# EAGLE board stereo_mix (EAGLE 9.4.2)

Size 65 x 100 mm. Coordinates in mm from the lower left corner, seen from the top.
Outline: 0,0 48.26,0 48.26,27.81 65,27.81 65,100 0,100 0,0
Copper layers (1*16): Top 0.035559375mm / dielectric 1.6mm / Bottom 0.035559375mm
Design rules "jlcpcb2layer": minimum track width 5mil, minimum drill 12mil, track to track 5mil, track to pad 5mil, pad to pad 5mil, via to via 5mil, smd to smd 5mil, copper to edge 8mil, drill to drill 6mil, minimum pad ring 5mil, minimum via ring 3mil, stop-mask expansion 2.5mil, vias tented up to drill 0mil, thermal gap 10mil

## Footprints (pad centres in the part's own frame; a part is rotated, then mirrored left to right if it is on the bottom)
C0603 = smd 1.1 x 1: 1 -0.85,0; 2 0.85,0
SOD323-W = smd 1.5 x 1.2: A 1.45,0; C -1.45,0
SO16 = smd 0.6 x 2.2: 1 -4.445,-2.6; 2 -3.175,-2.6; 3 -1.905,-2.6; 4 -0.635,-2.6; 5 0.635,-2.6; 6 1.905,-2.6; 7 3.175,-2.6; 8 4.445,-2.6; 9 4.445,2.6; 10 3.175,2.6; 11 1.905,2.6; 12 0.635,2.6; 13 -0.635,2.6; 14 -1.905,2.6; 15 -3.175,2.6; 16 -4.445,2.6
TSSOP14 = smd 0.305 x 0.991: 1 -1.95,-2.918; 2 -1.3,-2.918; 3 -0.65,-2.918; 4 0,-2.918; 5 0.65,-2.918; 6 1.3,-2.918; 7 1.95,-2.918; 8 1.95,2.918; 9 1.3,2.918; 10 0.65,2.918; 11 0,2.918; 12 -0.65,2.918; 13 -1.3,2.918; 14 -1.95,2.918
TSSOP8 = smd 0.35 x 1.2: 1 -0.975,-2.925; 2 -0.325,-2.925; 3 0.325,-2.925; 4 0.975,-2.925; 5 0.975,2.925; 6 0.325,2.925; 7 -0.325,2.925; 8 -0.975,2.925
SOT363_PHILIPS = smd 0.4 x 0.8: 1 -0.65,-0.8; 2 0,-0.8; 3 0.65,-0.8; 4 0.65,0.8; 5 0,0.8; 6 -0.65,0.8
R0603 = smd 1 x 1.1: 1 -0.85,0; 2 0.85,0
RTRIMT93YA = drill 0.61: 1 0,-2.54; 2 0,0; 3 0,2.54
SOT23-BEC = smd 1 x 1.4: B -0.95,-1.1; C 0,1.1; E 0.95,-1.1
WQP-PJ301M-12_JACK = drill 1.1: P$1_TIP 0,5; P$2_SWITCH 0,-3.5; P$3_SLEEVE 0,-6.5
JP2 = drill 0.914 long: 1 -2.54,0; 2 0,0; 3 2.54,0
9MM_SNAP-IN_POT = drill 1.1 square: 1 -2.5,-7 | drill 1.1 octagon: 2 0,-7; 3 2.5,-7 | drill 2.1 pad 2.794: CHASSIS1 -4.5,0; CHASSIS2 4.5,0

## Placement (x,y rotation side)
C1:C1  100pF  [C0603]  14.61,97.54 90 bottom
C1:C2  22pF  [C0603]  7.24,92.71 0 bottom
C1:C3  100pF  [C0603]  31.62,98.3 0 bottom
C1:C4  22pF  [C0603]  34.67,94.36 270 bottom
C1:C5  100pF  [C0603]  10.29,14.35 0 bottom
C1:C6  100pF  [C0603]  1.65,19.68 270 bottom
C1:C7  100nF  [C0603]  22.86,92.46 0 top
C1:C8  100nF  [C0603]  11.43,92.08 270 top
C1:C9  100nF  [C0603]  21.97,84.33 180 top
C1:C10  100nF  [C0603]  10.79,21.97 270 bottom
C1:C11  100nF  [C0603]  49.53,85.6 180 top
C1:C12  100nF  [C0603]  63.25,94.49 270 top
C1:C13  100nF  [C0603]  22.86,94.74 180 top
C1:C14  100nF  [C0603]  1.65,22.73 90 bottom
C1:C15  100nF  [C0603]  49.53,87.63 180 top
C1:C16  100nF  [C0603]  62.48,82.3 180 top
C1:C17  100nF  [C0603]  25.02,83.44 0 top
C1:C18  100nF  [C0603]  11.43,95.12 270 top
C1:D1  1N4148  [SOD323-W]  3.3,83.57 180 bottom
C1:D2  1N4148  [SOD323-W]  3.3,93.73 180 bottom
C1:IC1  LM13700M  [SO16]  22.86,83.82 0 bottom
C1:IC2  TL084PW  [TSSOP14]  11.43,93.6 0 bottom
C1:IC3  LM13700M  [SO16]  49.53,84.33 90 bottom
C1:IC4  TL084PW  [TSSOP14]  22.86,93.6 0 bottom
C1:IC5  TL084PW  [TSSOP14]  6.35,21.08 270 bottom
C1:IC6  TL082PW  [TSSOP8]  60.45,88.27 270 bottom
C1:Q1  BC847BS  [SOT363_PHILIPS]  2.54,14.48 180 bottom
C1:R1  22  [R0603]  12.83,82.3 180 bottom
C1:R2  470  [R0603]  9.78,82.3 180 bottom
C1:R3  510  [R0603]  8.89,84.33 180 bottom
C1:R4  21k  [R0603]  8.89,86.36 180 bottom
C1:R5  12k  [R0603]  31.62,82.42 0 bottom
C1:R6  7k2  [R0603]  31.62,80.39 0 bottom
C1:R7  6k8  [R0603]  12.83,86.87 90 bottom
C1:R8  560  [R0603]  8.89,88.39 180 bottom
C1:R9  15k  [R0603]  5.84,88.39 180 bottom
C1:R10  100k  [R0603]  7.24,90.68 0 bottom
C1:R11  680  [R0603]  4.19,90.68 180 bottom
C1:R12  1M  [R0603]  58.42,93.09 0 bottom
C1:R13  100k  [RTRIMT93YA]  59.69,96.52 270 bottom
C1:R14  47k  [R0603]  22.35,88.9 0 bottom
C1:R15  100k  [R0603]  8.76,98.04 0 bottom
C1:R16  68k  [R0603]  11.81,98.04 0 bottom
C1:R17  15k  [R0603]  19.05,92.2 270 bottom
C1:R18  680k  [R0603]  19.05,89.15 270 bottom
C1:R19  22  [R0603]  44.45,87.63 270 bottom
C1:R20  470  [R0603]  41.91,88.39 180 bottom
C1:R21  510  [R0603]  12.83,84.33 180 bottom
C1:R22  21k  [R0603]  15.88,84.33 0 bottom
C1:R23  12k  [R0603]  41.91,86.36 180 bottom
C1:R24  7k2  [R0603]  4.7,97.54 270 bottom
C1:R25  6k8  [R0603]  25.4,88.9 0 bottom
C1:R26  560  [R0603]  19.05,95.25 270 bottom
C1:R27  15k  [R0603]  18.92,97.79 0 bottom
C1:R28  100k  [R0603]  49.53,92.96 180 bottom
C1:R29  680  [R0603]  49.53,90.93 180 bottom
C1:R30  1M  [R0603]  46.61,97.54 90 bottom
C1:R31  100k  [RTRIMT93YA]  40.64,96.52 270 bottom
C1:R32  47k  [R0603]  31.62,96.27 0 bottom
C1:R33  100k  [R0603]  21.97,98.42 0 bottom
C1:R34  68k  [R0603]  25.02,98.42 0 bottom
C1:R35  15k  [R0603]  32.26,92.71 0 bottom
C1:R36  680k  [R0603]  32.26,90.68 0 bottom
C1:R37  1M  [R0603]  55.37,90.42 90 bottom
C1:R38  1k  [R0603]  54.99,87.38 270 bottom
C1:R39  1M  [R0603]  10.79,18.92 90 bottom
C1:R40  10k  [R0603]  10.29,16.38 0 bottom
C1:R41  10M  [R0603]  2.03,11.18 270 bottom
C1:R42  1k5  [R0603]  2.54,17.14 0 bottom
C1:R43  100k  [R0603]  61.47,85.09 90 bottom
C1:R44  100k  [R0603]  63.5,85.09 90 bottom
C1:R45  100k  [R0603]  1.65,25.78 90 bottom
C1:R46  100k  [R0603]  58.42,91.06 0 bottom
C1:R47  200k  [R0603]  52.83,98.3 0 bottom
C1:R48  200k  [R0603]  52.83,96.27 180 bottom
C1:R49  100k  [R0603]  49.53,95 180 bottom
C1:R50  100k  [R0603]  49.53,97.03 180 bottom
C1:R51  100k  [R0603]  41.91,92.46 0 bottom
C1:R52  100k  [R0603]  41.91,90.42 180 bottom
C1:R53  100k  [R0603]  32.26,86.36 180 bottom
C1:R54  100k  [R0603]  36.96,84.33 180 bottom
C1:T1  3906  [SOT23-BEC]  2.54,86.36 0 bottom
C1:T2  3906  [SOT23-BEC]  16.51,91.06 180 bottom
C1:T3  3906  [SOT23-BEC]  2.54,96.52 0 bottom
C1:T4  3906  [SOT23-BEC]  29.21,91.44 0 bottom
C2:C1  100pF  [C0603]  111.76,53.34 0 bottom  (outside the outline)
C2:C2  22pF  [C0603]  104.14,53.34 0 bottom  (outside the outline)
C2:C3  100pF  [C0603]  96.52,53.34 0 bottom  (outside the outline)
C2:C4  22pF  [C0603]  88.9,53.34 0 bottom  (outside the outline)
C2:C5  100pF  [C0603]  81.28,53.34 0 bottom  (outside the outline)
C2:C6  100pF  [C0603]  73.66,53.34 0 bottom  (outside the outline)
C2:C7  100nF  [C0603]  134.62,48.26 0 bottom  (outside the outline)
C2:C8  100nF  [C0603]  127,48.26 0 bottom  (outside the outline)
C2:C9  100nF  [C0603]  119.38,48.26 0 bottom  (outside the outline)
C2:C10  100nF  [C0603]  100.33,86.36 0 bottom  (outside the outline)
C2:C11  100nF  [C0603]  127,53.34 0 bottom  (outside the outline)
C2:C12  100nF  [C0603]  92.71,86.36 0 bottom  (outside the outline)
C2:C13  100nF  [C0603]  85.09,86.36 0 bottom  (outside the outline)
C2:C14  100nF  [C0603]  77.47,86.36 0 bottom  (outside the outline)
C2:C15  100nF  [C0603]  134.62,78.74 0 bottom  (outside the outline)
C2:C16  100nF  [C0603]  127,78.74 0 bottom  (outside the outline)
C2:C17  100nF  [C0603]  119.38,78.74 0 bottom  (outside the outline)
C2:C18  100nF  [C0603]  111.76,78.74 0 bottom  (outside the outline)
C2:D1  1N4148  [SOD323-W]  116.84,85.09 0 bottom  (outside the outline)
C2:D2  1N4148  [SOD323-W]  107.95,85.09 0 bottom  (outside the outline)
C2:IC1  LM13700M  [SO16]  22.86,66.04 0 bottom
C2:IC2  TL084PW  [TSSOP14]  11.43,74.93 0 bottom
C2:IC3  LM13700M  [SO16]  49.53,67.69 90 bottom
C2:IC4  TL084PW  [TSSOP14]  22.86,74.93 0 bottom
C2:IC5  TL084PW  [TSSOP14]  16.51,20.95 270 bottom
C2:IC6  TL082PW  [TSSOP8]  59.82,70.99 270 bottom
C2:Q1  BC847BS  [SOT363_PHILIPS]  127,85.09 0 bottom  (outside the outline)
C2:R1  22  [R0603]  111.76,48.26 0 bottom  (outside the outline)
C2:R2  470  [R0603]  104.14,48.26 0 bottom  (outside the outline)
C2:R3  510  [R0603]  96.52,48.26 0 bottom  (outside the outline)
C2:R4  21k  [R0603]  88.9,48.26 0 bottom  (outside the outline)
C2:R5  12k  [R0603]  81.28,48.26 0 bottom  (outside the outline)
C2:R6  7k2  [R0603]  73.66,48.26 0 bottom  (outside the outline)
C2:R7  6k8  [R0603]  134.62,43.18 0 bottom  (outside the outline)
C2:R8  560  [R0603]  127,43.18 0 bottom  (outside the outline)
C2:R9  15k  [R0603]  119.38,43.18 0 bottom  (outside the outline)
C2:R10  100k  [R0603]  104.14,78.74 0 bottom  (outside the outline)
C2:R11  680  [R0603]  119.38,53.34 0 bottom  (outside the outline)
C2:R12  1M  [R0603]  96.52,78.74 0 bottom  (outside the outline)
C2:R13  100k  [RTRIMT93YA]  59.69,80.01 270 bottom
C2:R14  47k  [R0603]  88.9,78.74 0 bottom  (outside the outline)
C2:R15  100k  [R0603]  81.28,78.74 0 bottom  (outside the outline)
C2:R16  68k  [R0603]  73.66,78.74 0 bottom  (outside the outline)
C2:R17  15k  [R0603]  134.62,73.66 0 bottom  (outside the outline)
C2:R18  680k  [R0603]  127,73.66 0 bottom  (outside the outline)
C2:R19  22  [R0603]  119.38,73.66 0 bottom  (outside the outline)
C2:R20  470  [R0603]  111.76,73.66 0 bottom  (outside the outline)
C2:R21  510  [R0603]  104.14,73.66 0 bottom  (outside the outline)
C2:R22  21k  [R0603]  96.52,73.66 0 bottom  (outside the outline)
C2:R23  12k  [R0603]  88.9,73.66 0 bottom  (outside the outline)
C2:R24  7k2  [R0603]  81.28,73.66 0 bottom  (outside the outline)
C2:R25  6k8  [R0603]  73.66,73.66 0 bottom  (outside the outline)
C2:R26  560  [R0603]  134.62,68.58 0 bottom  (outside the outline)
C2:R27  15k  [R0603]  127,68.58 0 bottom  (outside the outline)
C2:R28  100k  [R0603]  119.38,68.58 0 bottom  (outside the outline)
C2:R29  680  [R0603]  111.76,68.58 0 bottom  (outside the outline)
C2:R30  1M  [R0603]  104.14,68.58 0 bottom  (outside the outline)
C2:R31  100k  [RTRIMT93YA]  40.64,80.01 270 bottom
C2:R32  47k  [R0603]  96.52,68.58 0 bottom  (outside the outline)
C2:R33  100k  [R0603]  88.9,68.58 0 bottom  (outside the outline)
C2:R34  68k  [R0603]  81.28,68.58 0 bottom  (outside the outline)
C2:R35  15k  [R0603]  73.66,68.58 0 bottom  (outside the outline)
C2:R36  680k  [R0603]  134.62,63.5 0 bottom  (outside the outline)
C2:R37  1M  [R0603]  127,63.5 0 bottom  (outside the outline)
C2:R38  1k  [R0603]  119.38,63.5 0 bottom  (outside the outline)
C2:R39  1M  [R0603]  111.76,63.5 0 bottom  (outside the outline)
C2:R40  10k  [R0603]  104.14,63.5 0 bottom  (outside the outline)
C2:R41  10M  [R0603]  96.52,63.5 0 bottom  (outside the outline)
C2:R42  1k5  [R0603]  88.9,63.5 0 bottom  (outside the outline)
C2:R43  100k  [R0603]  81.28,63.5 0 bottom  (outside the outline)
C2:R44  100k  [R0603]  73.66,63.5 0 bottom  (outside the outline)
C2:R45  100k  [R0603]  134.62,58.42 0 bottom  (outside the outline)
C2:R46  100k  [R0603]  127,58.42 0 bottom  (outside the outline)
C2:R47  200k  [R0603]  119.38,58.42 0 bottom  (outside the outline)
C2:R48  200k  [R0603]  111.76,58.42 0 bottom  (outside the outline)
C2:R49  100k  [R0603]  104.14,58.42 0 bottom  (outside the outline)
C2:R50  100k  [R0603]  96.52,58.42 0 bottom  (outside the outline)
C2:R51  100k  [R0603]  88.9,58.42 0 bottom  (outside the outline)
C2:R52  100k  [R0603]  81.28,58.42 0 bottom  (outside the outline)
C2:R53  100k  [R0603]  73.66,58.42 0 bottom  (outside the outline)
C2:R54  100k  [R0603]  134.62,53.34 0 bottom  (outside the outline)
C2:T1  3906  [SOT23-BEC]  85.09,93.98 0 bottom  (outside the outline)
C2:T2  3906  [SOT23-BEC]  78.74,93.98 0 bottom  (outside the outline)
C2:T3  3906  [SOT23-BEC]  72.39,93.98 0 bottom  (outside the outline)
C2:T4  3906  [SOT23-BEC]  133.35,85.09 0 bottom  (outside the outline)
C3:C1  100pF  [C0603]  81.28,-30.48 0 bottom  (outside the outline)
C3:C2  22pF  [C0603]  73.66,-30.48 0 bottom  (outside the outline)
C3:C3  100pF  [C0603]  134.62,-35.56 0 bottom  (outside the outline)
C3:C4  22pF  [C0603]  127,-35.56 0 bottom  (outside the outline)
C3:C5  100pF  [C0603]  119.38,-35.56 0 bottom  (outside the outline)
C3:C6  100pF  [C0603]  111.76,-35.56 0 bottom  (outside the outline)
C3:C7  100nF  [C0603]  104.14,-35.56 0 bottom  (outside the outline)
C3:C8  100nF  [C0603]  96.52,-35.56 0 bottom  (outside the outline)
C3:C9  100nF  [C0603]  88.9,-35.56 0 bottom  (outside the outline)
C3:C10  100nF  [C0603]  107.95,2.54 0 bottom  (outside the outline)
C3:C11  100nF  [C0603]  96.52,-30.48 0 bottom  (outside the outline)
C3:C12  100nF  [C0603]  100.33,2.54 0 bottom  (outside the outline)
C3:C13  100nF  [C0603]  92.71,2.54 0 bottom  (outside the outline)
C3:C14  100nF  [C0603]  85.09,2.54 0 bottom  (outside the outline)
C3:C15  100nF  [C0603]  77.47,2.54 0 bottom  (outside the outline)
C3:C16  100nF  [C0603]  134.62,-5.08 0 bottom  (outside the outline)
C3:C17  100nF  [C0603]  127,-5.08 0 bottom  (outside the outline)
C3:C18  100nF  [C0603]  119.38,-5.08 0 bottom  (outside the outline)
C3:D1  1N4148  [SOD323-W]  124.46,1.27 0 bottom  (outside the outline)
C3:D2  1N4148  [SOD323-W]  115.57,1.27 0 bottom  (outside the outline)
C3:IC1  LM13700M  [SO16]  22.86,49.53 0 bottom
C3:IC2  TL084PW  [TSSOP14]  22.86,57.4 0 bottom
C3:IC3  LM13700M  [SO16]  49.53,51.31 90 bottom
C3:IC4  TL084PW  [TSSOP14]  33.02,49.53 0 bottom
C3:IC5  TL084PW  [TSSOP14]  6.35,7.11 270 bottom
C3:IC6  TL082PW  [TSSOP8]  59.69,54.48 270 bottom
C3:Q1  BC847BS  [SOT363_PHILIPS]  134.62,1.27 0 bottom  (outside the outline)
C3:R1  22  [R0603]  81.28,-35.56 0 bottom  (outside the outline)
C3:R2  470  [R0603]  73.66,-35.56 0 bottom  (outside the outline)
C3:R3  510  [R0603]  134.62,-40.64 0 bottom  (outside the outline)
C3:R4  21k  [R0603]  127,-40.64 0 bottom  (outside the outline)
C3:R5  12k  [R0603]  119.38,-40.64 0 bottom  (outside the outline)
C3:R6  7k2  [R0603]  111.76,-40.64 0 bottom  (outside the outline)
C3:R7  6k8  [R0603]  104.14,-40.64 0 bottom  (outside the outline)
C3:R8  560  [R0603]  96.52,-40.64 0 bottom  (outside the outline)
C3:R9  15k  [R0603]  88.9,-40.64 0 bottom  (outside the outline)
C3:R10  100k  [R0603]  111.76,-5.08 0 bottom  (outside the outline)
C3:R11  680  [R0603]  88.9,-30.48 0 bottom  (outside the outline)
C3:R12  1M  [R0603]  104.14,-5.08 0 bottom  (outside the outline)
C3:R13  100k  [RTRIMT93YA]  59.69,63.5 270 bottom
C3:R14  47k  [R0603]  96.52,-5.08 0 bottom  (outside the outline)
C3:R15  100k  [R0603]  88.9,-5.08 0 bottom  (outside the outline)
C3:R16  68k  [R0603]  81.28,-5.08 0 bottom  (outside the outline)
C3:R17  15k  [R0603]  134.62,-10.16 0 bottom  (outside the outline)
C3:R18  680k  [R0603]  127,-10.16 0 bottom  (outside the outline)
C3:R19  22  [R0603]  119.38,-10.16 0 bottom  (outside the outline)
C3:R20  470  [R0603]  111.76,-10.16 0 bottom  (outside the outline)
C3:R21  510  [R0603]  104.14,-10.16 0 bottom  (outside the outline)
C3:R22  21k  [R0603]  96.52,-10.16 0 bottom  (outside the outline)
C3:R23  12k  [R0603]  88.9,-10.16 0 bottom  (outside the outline)
C3:R24  7k2  [R0603]  81.28,-10.16 0 bottom  (outside the outline)
C3:R25  6k8  [R0603]  134.62,-15.24 0 bottom  (outside the outline)
C3:R26  560  [R0603]  127,-15.24 0 bottom  (outside the outline)
C3:R27  15k  [R0603]  119.38,-15.24 0 bottom  (outside the outline)
C3:R28  100k  [R0603]  111.76,-15.24 0 bottom  (outside the outline)
C3:R29  680  [R0603]  104.14,-15.24 0 bottom  (outside the outline)
C3:R30  1M  [R0603]  96.52,-15.24 0 bottom  (outside the outline)
C3:R31  100k  [RTRIMT93YA]  40.64,63.5 270 bottom
C3:R32  47k  [R0603]  88.9,-15.24 0 bottom  (outside the outline)
C3:R33  100k  [R0603]  81.28,-15.24 0 bottom  (outside the outline)
C3:R34  68k  [R0603]  134.62,-20.32 0 bottom  (outside the outline)
C3:R35  15k  [R0603]  127,-20.32 0 bottom  (outside the outline)
C3:R36  680k  [R0603]  119.38,-20.32 0 bottom  (outside the outline)
C3:R37  1M  [R0603]  111.76,-20.32 0 bottom  (outside the outline)
C3:R38  1k  [R0603]  104.14,-20.32 0 bottom  (outside the outline)
C3:R39  1M  [R0603]  96.52,-20.32 0 bottom  (outside the outline)
C3:R40  10k  [R0603]  88.9,-20.32 0 bottom  (outside the outline)
C3:R41  10M  [R0603]  81.28,-20.32 0 bottom  (outside the outline)
C3:R42  1k5  [R0603]  134.62,-25.4 0 bottom  (outside the outline)
C3:R43  100k  [R0603]  127,-25.4 0 bottom  (outside the outline)
C3:R44  100k  [R0603]  119.38,-25.4 0 bottom  (outside the outline)
C3:R45  100k  [R0603]  111.76,-25.4 0 bottom  (outside the outline)
C3:R46  100k  [R0603]  104.14,-25.4 0 bottom  (outside the outline)
C3:R47  200k  [R0603]  96.52,-25.4 0 bottom  (outside the outline)
C3:R48  200k  [R0603]  88.9,-25.4 0 bottom  (outside the outline)
C3:R49  100k  [R0603]  81.28,-25.4 0 bottom  (outside the outline)
C3:R50  100k  [R0603]  134.62,-30.48 0 bottom  (outside the outline)
C3:R51  100k  [R0603]  127,-30.48 0 bottom  (outside the outline)
C3:R52  100k  [R0603]  119.38,-30.48 0 bottom  (outside the outline)
C3:R53  100k  [R0603]  111.76,-30.48 0 bottom  (outside the outline)
C3:R54  100k  [R0603]  104.14,-30.48 0 bottom  (outside the outline)
C3:T1  3906  [SOT23-BEC]  99.06,10.16 0 bottom  (outside the outline)
C3:T2  3906  [SOT23-BEC]  92.71,10.16 0 bottom  (outside the outline)
C3:T3  3906  [SOT23-BEC]  86.36,10.16 0 bottom  (outside the outline)
C3:T4  3906  [SOT23-BEC]  80.01,10.16 0 bottom  (outside the outline)
C4:C1  100pF  [C0603]  -62.23,53.34 0 bottom  (outside the outline)
C4:C2  22pF  [C0603]  -69.85,53.34 0 bottom  (outside the outline)
C4:C3  100pF  [C0603]  -8.89,48.26 0 bottom  (outside the outline)
C4:C4  22pF  [C0603]  -16.51,48.26 0 bottom  (outside the outline)
C4:C5  100pF  [C0603]  -24.13,48.26 0 bottom  (outside the outline)
C4:C6  100pF  [C0603]  -31.75,48.26 0 bottom  (outside the outline)
C4:C7  100nF  [C0603]  -39.37,48.26 0 bottom  (outside the outline)
C4:C8  100nF  [C0603]  -46.99,48.26 0 bottom  (outside the outline)
C4:C9  100nF  [C0603]  -54.61,48.26 0 bottom  (outside the outline)
C4:C10  100nF  [C0603]  -35.56,86.36 0 bottom  (outside the outline)
C4:C11  100nF  [C0603]  -46.99,53.34 0 bottom  (outside the outline)
C4:C12  100nF  [C0603]  -43.18,86.36 0 bottom  (outside the outline)
C4:C13  100nF  [C0603]  -50.8,86.36 0 bottom  (outside the outline)
C4:C14  100nF  [C0603]  -58.42,86.36 0 bottom  (outside the outline)
C4:C15  100nF  [C0603]  -66.04,86.36 0 bottom  (outside the outline)
C4:C16  100nF  [C0603]  -8.89,78.74 0 bottom  (outside the outline)
C4:C17  100nF  [C0603]  -16.51,78.74 0 bottom  (outside the outline)
C4:C18  100nF  [C0603]  -24.13,78.74 0 bottom  (outside the outline)
C4:D1  1N4148  [SOD323-W]  -19.05,85.09 0 bottom  (outside the outline)
C4:D2  1N4148  [SOD323-W]  -27.94,85.09 0 bottom  (outside the outline)
C4:IC1  LM13700M  [SO16]  49.53,34.8 90 bottom
C4:IC2  TL084PW  [TSSOP14]  11.43,41.91 0 bottom
C4:IC3  LM13700M  [SO16]  22.86,33.02 0 bottom
C4:IC4  TL084PW  [TSSOP14]  22.86,40.64 0 bottom
C4:IC5  TL084PW  [TSSOP14]  16.51,7.11 270 bottom
C4:IC6  TL082PW  [TSSOP8]  59.82,37.97 270 bottom
C4:Q1  BC847BS  [SOT363_PHILIPS]  -8.89,85.09 0 bottom  (outside the outline)
C4:R1  22  [R0603]  -62.23,48.26 0 bottom  (outside the outline)
C4:R2  470  [R0603]  -69.85,48.26 0 bottom  (outside the outline)
C4:R3  510  [R0603]  -8.89,43.18 0 bottom  (outside the outline)
C4:R4  21k  [R0603]  -16.51,43.18 0 bottom  (outside the outline)
C4:R5  12k  [R0603]  -24.13,43.18 0 bottom  (outside the outline)
C4:R6  7k2  [R0603]  -31.75,43.18 0 bottom  (outside the outline)
C4:R7  6k8  [R0603]  -39.37,43.18 0 bottom  (outside the outline)
C4:R8  560  [R0603]  -46.99,43.18 0 bottom  (outside the outline)
C4:R9  15k  [R0603]  -54.61,43.18 0 bottom  (outside the outline)
C4:R10  100k  [R0603]  -31.75,78.74 0 bottom  (outside the outline)
C4:R11  680  [R0603]  -54.61,53.34 0 bottom  (outside the outline)
C4:R12  1M  [R0603]  -39.37,78.74 0 bottom  (outside the outline)
C4:R13  100k  [RTRIMT93YA]  59.69,46.99 270 bottom
C4:R14  47k  [R0603]  -46.99,78.74 0 bottom  (outside the outline)
C4:R15  100k  [R0603]  -54.61,78.74 0 bottom  (outside the outline)
C4:R16  68k  [R0603]  -62.23,78.74 0 bottom  (outside the outline)
C4:R17  15k  [R0603]  -8.89,73.66 0 bottom  (outside the outline)
C4:R18  680k  [R0603]  -16.51,73.66 0 bottom  (outside the outline)
C4:R19  22  [R0603]  -24.13,73.66 0 bottom  (outside the outline)
C4:R20  470  [R0603]  -31.75,73.66 0 bottom  (outside the outline)
C4:R21  510  [R0603]  -39.37,73.66 0 bottom  (outside the outline)
C4:R22  21k  [R0603]  -46.99,73.66 0 bottom  (outside the outline)
C4:R23  12k  [R0603]  -54.61,73.66 0 bottom  (outside the outline)
C4:R24  7k2  [R0603]  -62.23,73.66 0 bottom  (outside the outline)
C4:R25  6k8  [R0603]  -8.89,68.58 0 bottom  (outside the outline)
C4:R26  560  [R0603]  -16.51,68.58 0 bottom  (outside the outline)
C4:R27  15k  [R0603]  -24.13,68.58 0 bottom  (outside the outline)
C4:R28  100k  [R0603]  -31.75,68.58 0 bottom  (outside the outline)
C4:R29  680  [R0603]  -39.37,68.58 0 bottom  (outside the outline)
C4:R30  1M  [R0603]  -46.99,68.58 0 bottom  (outside the outline)
C4:R31  100k  [RTRIMT93YA]  40.64,46.99 270 bottom
C4:R32  47k  [R0603]  -54.61,68.58 0 bottom  (outside the outline)
C4:R33  100k  [R0603]  -62.23,68.58 0 bottom  (outside the outline)
C4:R34  68k  [R0603]  -8.89,63.5 0 bottom  (outside the outline)
C4:R35  15k  [R0603]  -16.51,63.5 0 bottom  (outside the outline)
C4:R36  680k  [R0603]  -24.13,63.5 0 bottom  (outside the outline)
C4:R37  1M  [R0603]  -31.75,63.5 0 bottom  (outside the outline)
C4:R38  1k  [R0603]  -39.37,63.5 0 bottom  (outside the outline)
C4:R39  1M  [R0603]  -46.99,63.5 0 bottom  (outside the outline)
C4:R40  10k  [R0603]  -54.61,63.5 0 bottom  (outside the outline)
C4:R41  10M  [R0603]  -62.23,63.5 0 bottom  (outside the outline)
C4:R42  1k5  [R0603]  -8.89,58.42 0 bottom  (outside the outline)
C4:R43  100k  [R0603]  -16.51,58.42 0 bottom  (outside the outline)
C4:R44  100k  [R0603]  -24.13,58.42 0 bottom  (outside the outline)
C4:R45  100k  [R0603]  -31.75,58.42 0 bottom  (outside the outline)
C4:R46  100k  [R0603]  -39.37,58.42 0 bottom  (outside the outline)
C4:R47  200k  [R0603]  -46.99,58.42 0 bottom  (outside the outline)
C4:R48  200k  [R0603]  -54.61,58.42 0 bottom  (outside the outline)
C4:R49  100k  [R0603]  -62.23,58.42 0 bottom  (outside the outline)
C4:R50  100k  [R0603]  -8.89,53.34 0 bottom  (outside the outline)
C4:R51  100k  [R0603]  -16.51,53.34 0 bottom  (outside the outline)
C4:R52  100k  [R0603]  -24.13,53.34 0 bottom  (outside the outline)
C4:R53  100k  [R0603]  -31.75,53.34 0 bottom  (outside the outline)
C4:R54  100k  [R0603]  -39.37,53.34 0 bottom  (outside the outline)
C4:T1  3906  [SOT23-BEC]  -44.45,93.98 0 bottom  (outside the outline)
C4:T2  3906  [SOT23-BEC]  -50.8,93.98 0 bottom  (outside the outline)
C4:T3  3906  [SOT23-BEC]  -57.15,93.98 0 bottom  (outside the outline)
C4:T4  3906  [SOT23-BEC]  -63.5,93.98 0 bottom  (outside the outline)
U1  THONKICONNNEW  [WQP-PJ301M-12_JACK]  6.35,91.44 180 top
U2  THONKICONNNEW  [WQP-PJ301M-12_JACK]  16.51,91.44 180 top
U3  THONKICONNNEW  [WQP-PJ301M-12_JACK]  29.21,91.44 180 top
U4  THONKICONNNEW  [WQP-PJ301M-12_JACK]  6.35,21.59 180 top
U5  THONKICONNNEW  [WQP-PJ301M-12_JACK]  6.35,74.93 180 top
U6  THONKICONNNEW  [WQP-PJ301M-12_JACK]  16.51,74.93 180 top
U7  THONKICONNNEW  [WQP-PJ301M-12_JACK]  29.21,74.93 180 top
U8  THONKICONNNEW  [WQP-PJ301M-12_JACK]  16.51,21.59 180 top
U9  THONKICONNNEW  [WQP-PJ301M-12_JACK]  6.35,58.42 180 top
U10  THONKICONNNEW  [WQP-PJ301M-12_JACK]  16.51,58.42 180 top
U11  THONKICONNNEW  [WQP-PJ301M-12_JACK]  29.21,58.42 180 top
U12  THONKICONNNEW  [WQP-PJ301M-12_JACK]  6.35,7.62 180 top
U13  THONKICONNNEW  [WQP-PJ301M-12_JACK]  6.35,41.91 180 top
U14  THONKICONNNEW  [WQP-PJ301M-12_JACK]  16.51,41.91 180 top
U15  THONKICONNNEW  [WQP-PJ301M-12_JACK]  29.21,41.91 180 top
U16  THONKICONNNEW  [WQP-PJ301M-12_JACK]  16.51,7.62 180 top
U17  THONKICONNNEW  [WQP-PJ301M-12_JACK]  29.21,21.59 180 top
U18  THONKICONNNEW  [WQP-PJ301M-12_JACK]  39.37,21.59 180 top
U19  THONKICONNNEW  [WQP-PJ301M-12_JACK]  29.21,7.62 180 top
U20  THONKICONNNEW  [WQP-PJ301M-12_JACK]  39.37,7.62 180 top
UB_L  [JP2]  45.72,24.13 90 top
UB_R  [JP2]  45.72,5.08 90 top
VR1  [9MM_SNAP-IN_POT]  41.91,91.44 0 top
VR2  [9MM_SNAP-IN_POT]  57.15,91.44 0 top
VR3  [9MM_SNAP-IN_POT]  41.91,74.93 0 top
VR4  [9MM_SNAP-IN_POT]  57.15,74.93 0 top
VR5  [9MM_SNAP-IN_POT]  41.91,58.42 0 top
VR6  [9MM_SNAP-IN_POT]  57.15,58.42 0 top
VR7  [9MM_SNAP-IN_POT]  41.91,41.91 0 top
VR8  [9MM_SNAP-IN_POT]  57.15,41.91 0 top

## Library data of the parts
C1:C1-C1:C18 C2:C1-C2:C18 C3:C1-C3:C18 C4:C1-C4:C18 = rcl; SPICEPREFIX: C
C1:D1 C1:D2 C2:D1 C2:D2 C3:D1 C3:D2 C4:D1 C4:D2 = diode
C1:IC1 C1:IC3 C2:IC1 C2:IC3 C3:IC1 C3:IC3 C4:IC1 C4:IC3 = ota
C1:IC2 C1:IC4-C1:IC6 C2:IC2 C2:IC4-C2:IC6 C3:IC2 C3:IC4-C3:IC6 C4:IC2 C4:IC4-C4:IC6 = op-amp
C1:Q1 C2:Q1 C3:Q1 C4:Q1 = transistor-small-signal
C1:R1-C1:R12 C1:R14-C1:R30 C1:R32-C1:R54 C2:R1-C2:R12 C2:R14-C2:R30 C2:R32-C2:R54 C3:R1-C3:R12 C3:R14-C3:R30 C3:R32-C3:R54 C4:R1-C4:R12 C4:R14-C4:R30 C4:R32-C4:R54 = rcl; SPICEPREFIX: R
C1:R13 C1:R31 C2:R13 C2:R31 C3:R13 C3:R31 C4:R13 C4:R31 = rcl; SPICEMODEL: X; SPICEPREFIXL: POT
C1:T1-C1:T4 C2:T1-C2:T4 C3:T1-C3:T4 C4:T1-C4:T4 = transistor-neu-to92
U1-U20 = MusicThingModular
UB_L UB_R = jumper
VR1-VR8 = MusicThingModular; SPICEPREFIX: J

## Nets
+12V: C1:C7.2 C1:C8.2 C1:C9.2 C1:C10.2 C1:C11.2 C1:C12.2 C1:IC1.11 C1:IC2.4 C1:IC3.11 C1:IC4.4 C1:IC5.4 C1:IC6.8 C1:R5.1 C1:R13.1 C1:R23.1 C1:R31.1 C1:R37.2 C1:R41.2 C2:C7.2 C2:C8.2 C2:C9.2 C2:C10.2 C2:C11.2 C2:C12.2 C2:IC1.11 C2:IC2.4 C2:IC3.11 C2:IC4.4 C2:IC5.4 C2:IC6.8 C2:R5.1 C2:R13.1 C2:R23.1 C2:R31.1 C2:R37.2 C2:R41.2 C3:C7.2 C3:C8.2 C3:C9.2 C3:C10.2 C3:C11.2 C3:C12.2 C3:IC1.11 C3:IC2.4 C3:IC3.11 C3:IC4.4 C3:IC5.4 C3:IC6.8 C3:R5.1 C3:R13.1 C3:R23.1 C3:R31.1 C3:R37.2 C3:R41.2 C4:C7.2 C4:C8.2 C4:C9.2 C4:C10.2 C4:C11.2 C4:C12.2 C4:IC1.11 C4:IC2.4 C4:IC3.11 C4:IC4.4 C4:IC5.4 C4:IC6.8 C4:R5.1 C4:R13.1 C4:R23.1 C4:R31.1 C4:R37.2 C4:R41.2
-12V: C1:C13.1 C1:C14.1 C1:C15.1 C1:C16.1 C1:C17.1 C1:C18.1 C1:IC1.6 C1:IC2.11 C1:IC3.6 C1:IC4.11 C1:IC5.11 C1:IC6.4 C1:R13.3 C1:R18.2 C1:R31.3 C1:R36.2 C2:C13.1 C2:C14.1 C2:C15.1 C2:C16.1 C2:C17.1 C2:C18.1 C2:IC1.6 C2:IC2.11 C2:IC3.6 C2:IC4.11 C2:IC5.11 C2:IC6.4 C2:R13.3 C2:R18.2 C2:R31.3 C2:R36.2 C3:C13.1 C3:C14.1 C3:C15.1 C3:C16.1 C3:C17.1 C3:C18.1 C3:IC1.6 C3:IC2.11 C3:IC3.6 C3:IC4.11 C3:IC5.11 C3:IC6.4 C3:R13.3 C3:R18.2 C3:R31.3 C3:R36.2 C4:C13.1 C4:C14.1 C4:C15.1 C4:C16.1 C4:C17.1 C4:C18.1 C4:IC1.6 C4:IC2.11 C4:IC3.6 C4:IC4.11 C4:IC5.11 C4:IC6.4 C4:R13.3 C4:R18.2 C4:R31.3 C4:R36.2
C1:N$1: C1:IC1.4 C1:R1.2
C1:N$2: C1:R1.1 C1:R2.2
C1:N$3: C1:IC1.3 C1:R3.2 C1:R4.2
C1:N$4: C1:IC1.1 C1:R6.2
C1:N$5: C1:IC1.2 C1:R5.2
C1:N$6: C1:R6.1 C1:T1.C
C1:N$7: C1:D1.A C1:IC2.1 C1:T1.B
C1:N$8: C1:D1.C C1:IC2.2 C1:R7.2 C1:T1.E
C1:N$9: C1:IC1.5 C1:IC2.6 C1:R9.1
C1:N$10: C1:R8.1 C1:R9.2
C1:N$11: C1:IC2.7 C1:R8.2 C1:R10.1
C1:N$12: C1:C1.1 C1:IC1.13 C1:R12.2 C1:R14.1
C1:N$13: C1:IC1.14 C1:R10.2 C1:R11.2
C1:N$14: C1:R12.1 C1:R13.2
C1:N$15: C1:C2.1 C1:IC2.9 C1:R15.1 C1:R16.2
C1:N$16: C1:C1.2 C1:IC1.12 C1:IC2.10 C1:R14.2
C1:N$17: C1:IC1.16 C1:R17.2
C1:N$18: C1:R17.1 C1:R18.1 C1:T2.C
C1:N$19: C1:IC2.13 C1:IC2.14 C1:T2.B
C1:N$20: C1:IC3.4 C1:R19.2
C1:N$21: C1:R19.1 C1:R20.2
C1:N$22: C1:IC3.3 C1:R21.2 C1:R22.2
C1:N$23: C1:IC3.2 C1:R23.2
C1:N$24: C1:IC3.1 C1:R24.2
C1:N$25: C1:R24.1 C1:T3.C
C1:N$26: C1:D2.A C1:IC4.1 C1:T3.B
C1:N$27: C1:D2.C C1:IC4.2 C1:R25.2 C1:T3.E
C1:N$28: C1:IC3.5 C1:IC4.6 C1:R27.1
C1:N$29: C1:R26.1 C1:R27.2
C1:N$30: C1:IC4.7 C1:R26.2 C1:R28.1
C1:N$31: C1:IC3.14 C1:R28.2 C1:R29.2
C1:N$32: C1:C3.1 C1:IC3.13 C1:R30.2 C1:R32.1
C1:N$33: C1:R30.1 C1:R31.2
C1:N$34: C1:C3.2 C1:IC3.12 C1:IC4.10 C1:R32.2
C1:N$35: C1:C4.1 C1:IC4.9 C1:R33.1 C1:R34.2
C1:N$36: C1:IC3.16 C1:R35.2
C1:N$37: C1:R35.1 C1:R36.1 C1:T4.C
C1:N$38: C1:IC4.13 C1:IC4.14 C1:T4.B
C1:N$39: C1:IC5.1 C1:IC5.2 C1:R39.2
C1:N$40: C1:IC5.3 C1:R37.1 C1:R38.1
C1:N$41: C1:C5.1 C1:IC5.6 C1:R39.1 C1:R40.1
C1:N$42: C1:C5.2 C1:IC5.7 C1:Q1.2 C1:R40.2
C1:N$43: C1:IC6.5 C1:R43.2 C1:R44.2
C1:N$44: C1:C6.1 C1:IC5.9 C1:Q1.6 C1:R41.1
C1:N$45: C1:IC6.6 C1:R45.2 C1:R46.1
C1:N$46: C1:Q1.1 C1:Q1.4 C1:R42.2
C1:N$47: C1:IC6.2 C1:R47.1 C1:R48.2
C1:N$48: C1:IC5.13 C1:R51.2 C1:R52.1
C1:N$50: C1:IC6.3 C1:R49.2 C1:R50.2
C1:OUT_L: C1:C2.2 C1:IC2.8 C1:R15.2
C1:OUT_R: C1:C4.2 C1:IC4.8 C1:R33.2
C1:PAN_CV: C1:IC5.14 C1:R45.1 C1:R49.1 C1:R51.1
C1:PAN_CV_L: C1:IC6.7 C1:R7.1 C1:R46.2
C1:PAN_CV_R: C1:IC6.1 C1:R25.1 C1:R47.2
C1:REF_5: C1:R43.1 C1:R50.1
C1:VOLUME_CV_LOG: C1:C6.2 C1:IC2.12 C1:IC4.12 C1:IC5.8 C1:R42.1
C2:N$1: C2:IC1.4 C2:R1.2
C2:N$2: C2:R1.1 C2:R2.2
C2:N$3: C2:IC1.3 C2:R3.2 C2:R4.2
C2:N$4: C2:IC1.1 C2:R6.2
C2:N$5: C2:IC1.2 C2:R5.2
C2:N$6: C2:R6.1 C2:T1.C
C2:N$7: C2:D1.A C2:IC2.1 C2:T1.B
C2:N$8: C2:D1.C C2:IC2.2 C2:R7.2 C2:T1.E
C2:N$9: C2:IC1.5 C2:IC2.6 C2:R9.1
C2:N$10: C2:R8.1 C2:R9.2
C2:N$11: C2:IC2.7 C2:R8.2 C2:R10.1
C2:N$12: C2:C1.1 C2:IC1.13 C2:R12.2 C2:R14.1
C2:N$13: C2:IC1.14 C2:R10.2 C2:R11.2
C2:N$14: C2:R12.1 C2:R13.2
C2:N$15: C2:C2.1 C2:IC2.9 C2:R15.1 C2:R16.2
C2:N$16: C2:C1.2 C2:IC1.12 C2:IC2.10 C2:R14.2
C2:N$17: C2:IC1.16 C2:R17.2
C2:N$18: C2:R17.1 C2:R18.1 C2:T2.C
C2:N$19: C2:IC2.13 C2:IC2.14 C2:T2.B
C2:N$20: C2:IC3.4 C2:R19.2
C2:N$21: C2:R19.1 C2:R20.2
C2:N$22: C2:IC3.3 C2:R21.2 C2:R22.2
C2:N$23: C2:IC3.2 C2:R23.2
C2:N$24: C2:IC3.1 C2:R24.2
C2:N$25: C2:R24.1 C2:T3.C
C2:N$26: C2:D2.A C2:IC4.1 C2:T3.B
C2:N$27: C2:D2.C C2:IC4.2 C2:R25.2 C2:T3.E
C2:N$28: C2:IC3.5 C2:IC4.6 C2:R27.1
C2:N$29: C2:R26.1 C2:R27.2
C2:N$30: C2:IC4.7 C2:R26.2 C2:R28.1
C2:N$31: C2:IC3.14 C2:R28.2 C2:R29.2
C2:N$32: C2:C3.1 C2:IC3.13 C2:R30.2 C2:R32.1
C2:N$33: C2:R30.1 C2:R31.2
C2:N$34: C2:C3.2 C2:IC3.12 C2:IC4.10 C2:R32.2
C2:N$35: C2:C4.1 C2:IC4.9 C2:R33.1 C2:R34.2
C2:N$36: C2:IC3.16 C2:R35.2
C2:N$37: C2:R35.1 C2:R36.1 C2:T4.C
C2:N$38: C2:IC4.13 C2:IC4.14 C2:T4.B
C2:N$39: C2:IC5.1 C2:IC5.2 C2:R39.2
C2:N$40: C2:IC5.3 C2:R37.1 C2:R38.1
C2:N$41: C2:C5.1 C2:IC5.6 C2:R39.1 C2:R40.1
C2:N$42: C2:C5.2 C2:IC5.7 C2:Q1.2 C2:R40.2
C2:N$43: C2:IC6.5 C2:R43.2 C2:R44.2
C2:N$44: C2:C6.1 C2:IC5.9 C2:Q1.6 C2:R41.1
C2:N$45: C2:IC6.6 C2:R45.2 C2:R46.1
C2:N$46: C2:Q1.1 C2:Q1.4 C2:R42.2
C2:N$47: C2:IC6.2 C2:R47.1 C2:R48.2
C2:N$48: C2:IC5.13 C2:R51.2 C2:R52.1
C2:N$50: C2:IC6.3 C2:R49.2 C2:R50.2
C2:OUT_L: C2:C2.2 C2:IC2.8 C2:R15.2
C2:OUT_R: C2:C4.2 C2:IC4.8 C2:R33.2
C2:PAN_CV: C2:IC5.14 C2:R45.1 C2:R49.1 C2:R51.1
C2:PAN_CV_L: C2:IC6.7 C2:R7.1 C2:R46.2
C2:PAN_CV_R: C2:IC6.1 C2:R25.1 C2:R47.2
C2:REF_5: C2:R43.1 C2:R50.1
C2:VOLUME_CV_LOG: C2:C6.2 C2:IC2.12 C2:IC4.12 C2:IC5.8 C2:R42.1
C3:N$1: C3:IC1.4 C3:R1.2
C3:N$2: C3:R1.1 C3:R2.2
C3:N$3: C3:IC1.3 C3:R3.2 C3:R4.2
C3:N$4: C3:IC1.1 C3:R6.2
C3:N$5: C3:IC1.2 C3:R5.2
C3:N$6: C3:R6.1 C3:T1.C
C3:N$7: C3:D1.A C3:IC2.1 C3:T1.B
C3:N$8: C3:D1.C C3:IC2.2 C3:R7.2 C3:T1.E
C3:N$9: C3:IC1.5 C3:IC2.6 C3:R9.1
C3:N$10: C3:R8.1 C3:R9.2
C3:N$11: C3:IC2.7 C3:R8.2 C3:R10.1
C3:N$12: C3:C1.1 C3:IC1.13 C3:R12.2 C3:R14.1
C3:N$13: C3:IC1.14 C3:R10.2 C3:R11.2
C3:N$14: C3:R12.1 C3:R13.2
C3:N$15: C3:C2.1 C3:IC2.9 C3:R15.1 C3:R16.2
C3:N$16: C3:C1.2 C3:IC1.12 C3:IC2.10 C3:R14.2
C3:N$17: C3:IC1.16 C3:R17.2
C3:N$18: C3:R17.1 C3:R18.1 C3:T2.C
C3:N$19: C3:IC2.13 C3:IC2.14 C3:T2.B
C3:N$20: C3:IC3.4 C3:R19.2
C3:N$21: C3:R19.1 C3:R20.2
C3:N$22: C3:IC3.3 C3:R21.2 C3:R22.2
C3:N$23: C3:IC3.2 C3:R23.2
C3:N$24: C3:IC3.1 C3:R24.2
C3:N$25: C3:R24.1 C3:T3.C
C3:N$26: C3:D2.A C3:IC4.1 C3:T3.B
C3:N$27: C3:D2.C C3:IC4.2 C3:R25.2 C3:T3.E
C3:N$28: C3:IC3.5 C3:IC4.6 C3:R27.1
C3:N$29: C3:R26.1 C3:R27.2
C3:N$30: C3:IC4.7 C3:R26.2 C3:R28.1
C3:N$31: C3:IC3.14 C3:R28.2 C3:R29.2
C3:N$32: C3:C3.1 C3:IC3.13 C3:R30.2 C3:R32.1
C3:N$33: C3:R30.1 C3:R31.2
C3:N$34: C3:C3.2 C3:IC3.12 C3:IC4.10 C3:R32.2
C3:N$35: C3:C4.1 C3:IC4.9 C3:R33.1 C3:R34.2
C3:N$36: C3:IC3.16 C3:R35.2
C3:N$37: C3:R35.1 C3:R36.1 C3:T4.C
C3:N$38: C3:IC4.13 C3:IC4.14 C3:T4.B
C3:N$39: C3:IC5.1 C3:IC5.2 C3:R39.2
C3:N$40: C3:IC5.3 C3:R37.1 C3:R38.1
C3:N$41: C3:C5.1 C3:IC5.6 C3:R39.1 C3:R40.1
C3:N$42: C3:C5.2 C3:IC5.7 C3:Q1.2 C3:R40.2
C3:N$43: C3:IC6.5 C3:R43.2 C3:R44.2
C3:N$44: C3:C6.1 C3:IC5.9 C3:Q1.6 C3:R41.1
C3:N$45: C3:IC6.6 C3:R45.2 C3:R46.1
C3:N$46: C3:Q1.1 C3:Q1.4 C3:R42.2
C3:N$47: C3:IC6.2 C3:R47.1 C3:R48.2
C3:N$48: C3:IC5.13 C3:R51.2 C3:R52.1
C3:N$50: C3:IC6.3 C3:R49.2 C3:R50.2
C3:OUT_L: C3:C2.2 C3:IC2.8 C3:R15.2
C3:OUT_R: C3:C4.2 C3:IC4.8 C3:R33.2
C3:PAN_CV: C3:IC5.14 C3:R45.1 C3:R49.1 C3:R51.1
C3:PAN_CV_L: C3:IC6.7 C3:R7.1 C3:R46.2
C3:PAN_CV_R: C3:IC6.1 C3:R25.1 C3:R47.2
C3:REF_5: C3:R43.1 C3:R50.1
C3:VOLUME_CV_LOG: C3:C6.2 C3:IC2.12 C3:IC4.12 C3:IC5.8 C3:R42.1
C4:N$1: C4:IC1.4 C4:R1.2
C4:N$2: C4:R1.1 C4:R2.2
C4:N$3: C4:IC1.3 C4:R3.2 C4:R4.2
C4:N$4: C4:IC1.1 C4:R6.2
C4:N$5: C4:IC1.2 C4:R5.2
C4:N$6: C4:R6.1 C4:T1.C
C4:N$7: C4:D1.A C4:IC2.1 C4:T1.B
C4:N$8: C4:D1.C C4:IC2.2 C4:R7.2 C4:T1.E
C4:N$9: C4:IC1.5 C4:IC2.6 C4:R9.1
C4:N$10: C4:R8.1 C4:R9.2
C4:N$11: C4:IC2.7 C4:R8.2 C4:R10.1
C4:N$12: C4:C1.1 C4:IC1.13 C4:R12.2 C4:R14.1
C4:N$13: C4:IC1.14 C4:R10.2 C4:R11.2
C4:N$14: C4:R12.1 C4:R13.2
C4:N$15: C4:C2.1 C4:IC2.9 C4:R15.1 C4:R16.2
C4:N$16: C4:C1.2 C4:IC1.12 C4:IC2.10 C4:R14.2
C4:N$17: C4:IC1.16 C4:R17.2
C4:N$18: C4:R17.1 C4:R18.1 C4:T2.C
C4:N$19: C4:IC2.13 C4:IC2.14 C4:T2.B
C4:N$20: C4:IC3.4 C4:R19.2
C4:N$21: C4:R19.1 C4:R20.2
C4:N$22: C4:IC3.3 C4:R21.2 C4:R22.2
C4:N$23: C4:IC3.2 C4:R23.2
C4:N$24: C4:IC3.1 C4:R24.2
C4:N$25: C4:R24.1 C4:T3.C
C4:N$26: C4:D2.A C4:IC4.1 C4:T3.B
C4:N$27: C4:D2.C C4:IC4.2 C4:R25.2 C4:T3.E
C4:N$28: C4:IC3.5 C4:IC4.6 C4:R27.1
C4:N$29: C4:R26.1 C4:R27.2
C4:N$30: C4:IC4.7 C4:R26.2 C4:R28.1
C4:N$31: C4:IC3.14 C4:R28.2 C4:R29.2
C4:N$32: C4:C3.1 C4:IC3.13 C4:R30.2 C4:R32.1
C4:N$33: C4:R30.1 C4:R31.2
C4:N$34: C4:C3.2 C4:IC3.12 C4:IC4.10 C4:R32.2
C4:N$35: C4:C4.1 C4:IC4.9 C4:R33.1 C4:R34.2
C4:N$36: C4:IC3.16 C4:R35.2
C4:N$37: C4:R35.1 C4:R36.1 C4:T4.C
C4:N$38: C4:IC4.13 C4:IC4.14 C4:T4.B
C4:N$39: C4:IC5.1 C4:IC5.2 C4:R39.2
C4:N$40: C4:IC5.3 C4:R37.1 C4:R38.1
C4:N$41: C4:C5.1 C4:IC5.6 C4:R39.1 C4:R40.1
C4:N$42: C4:C5.2 C4:IC5.7 C4:Q1.2 C4:R40.2
C4:N$43: C4:IC6.5 C4:R43.2 C4:R44.2
C4:N$44: C4:C6.1 C4:IC5.9 C4:Q1.6 C4:R41.1
C4:N$45: C4:IC6.6 C4:R45.2 C4:R46.1
C4:N$46: C4:Q1.1 C4:Q1.4 C4:R42.2
C4:N$47: C4:IC6.2 C4:R47.1 C4:R48.2
C4:N$48: C4:IC5.13 C4:R51.2 C4:R52.1
C4:N$50: C4:IC6.3 C4:R49.2 C4:R50.2
C4:OUT_L: C4:C2.2 C4:IC2.8 C4:R15.2
C4:OUT_R: C4:C4.2 C4:IC4.8 C4:R33.2
C4:PAN_CV: C4:IC5.14 C4:R45.1 C4:R49.1 C4:R51.1
C4:PAN_CV_L: C4:IC6.7 C4:R7.1 C4:R46.2
C4:PAN_CV_R: C4:IC6.1 C4:R25.1 C4:R47.2
C4:REF_5: C4:R43.1 C4:R50.1
C4:VOLUME_CV_LOG: C4:C6.2 C4:IC2.12 C4:IC4.12 C4:IC5.8 C4:R42.1
GND: C1:C7.1 C1:C8.1 C1:C9.1 C1:C10.1 C1:C11.1 C1:C12.1 C1:C13.2 C1:C14.2 C1:C15.2 C1:C16.2 C1:C17.2 C1:C18.2 C1:IC2.3 C1:IC2.5 C1:IC4.3 C1:IC4.5 C1:IC5.5 C1:IC5.10 C1:Q1.3 C1:Q1.5 C1:R2.1 C1:R3.1 C1:R11.1 C1:R16.1 C1:R20.1 C1:R21.1 C1:R29.1 C1:R34.1 C1:R44.1 C1:R48.1 C1:T2.E C1:T4.E C2:C7.1 C2:C8.1 C2:C9.1 C2:C10.1 C2:C11.1 C2:C12.1 C2:C13.2 C2:C14.2 C2:C15.2 C2:C16.2 C2:C17.2 C2:C18.2 C2:IC2.3 C2:IC2.5 C2:IC4.3 C2:IC4.5 C2:IC5.5 C2:IC5.10 C2:Q1.3 C2:Q1.5 C2:R2.1 C2:R3.1 C2:R11.1 C2:R16.1 C2:R20.1 C2:R21.1 C2:R29.1 C2:R34.1 C2:R44.1 C2:R48.1 C2:T2.E C2:T4.E C3:C7.1 C3:C8.1 C3:C9.1 C3:C10.1 C3:C11.1 C3:C12.1 C3:C13.2 C3:C14.2 C3:C15.2 C3:C16.2 C3:C17.2 C3:C18.2 C3:IC2.3 C3:IC2.5 C3:IC4.3 C3:IC4.5 C3:IC5.5 C3:IC5.10 C3:Q1.3 C3:Q1.5 C3:R2.1 C3:R3.1 C3:R11.1 C3:R16.1 C3:R20.1 C3:R21.1 C3:R29.1 C3:R34.1 C3:R44.1 C3:R48.1 C3:T2.E C3:T4.E C4:C7.1 C4:C8.1 C4:C9.1 C4:C10.1 C4:C11.1 C4:C12.1 C4:C13.2 C4:C14.2 C4:C15.2 C4:C16.2 C4:C17.2 C4:C18.2 C4:IC2.3 C4:IC2.5 C4:IC4.3 C4:IC4.5 C4:IC5.5 C4:IC5.10 C4:Q1.3 C4:Q1.5 C4:R2.1 C4:R3.1 C4:R11.1 C4:R16.1 C4:R20.1 C4:R21.1 C4:R29.1 C4:R34.1 C4:R44.1 C4:R48.1 C4:T2.E C4:T4.E U1.P$3_SLEEVE U2.P$3_SLEEVE U3.P$3_SLEEVE U4.P$3_SLEEVE U5.P$3_SLEEVE U6.P$3_SLEEVE U7.P$3_SLEEVE U8.P$3_SLEEVE U9.P$3_SLEEVE U10.P$3_SLEEVE U11.P$3_SLEEVE U12.P$3_SLEEVE U13.P$3_SLEEVE U14.P$3_SLEEVE U15.P$3_SLEEVE U16.P$3_SLEEVE U17.P$3_SLEEVE U18.P$3_SLEEVE U19.P$3_SLEEVE U20.P$3_SLEEVE VR2.1 VR4.1 VR6.1 VR8.1
N$1: C1:R4.1 U1.P$1_TIP U2.P$2_SWITCH
N$2: C1:R22.1 U2.P$1_TIP
N$3: C1:IC5.12 C1:R53.2 C1:R54.1 VR1.2
N$4: C2:R4.1 U5.P$1_TIP U6.P$2_SWITCH
N$5: C1:R52.2 C1:R53.1 U3.P$1_TIP VR1.3
N$6: C1:R54.2 VR1.1
N$7: C1:R38.2 VR2.2
N$8: C2:R22.1 U6.P$1_TIP
N$9: C2:IC5.12 C2:R53.2 C2:R54.1 VR3.2
N$10: C2:R52.2 C2:R53.1 U7.P$1_TIP VR3.3
N$11: C2:R54.2 VR3.1
N$12: C2:R38.2 VR4.2
N$13: U8.P$1_TIP VR4.3
N$14: C3:R4.1 U9.P$1_TIP U10.P$2_SWITCH
N$15: C3:R22.1 U10.P$1_TIP
N$16: C3:IC5.12 C3:R53.2 C3:R54.1 VR5.2
N$17: U4.P$1_TIP VR2.3
N$18: C3:R52.2 C3:R53.1 U11.P$1_TIP VR5.3
N$19: C3:R54.2 VR5.1
N$20: C3:R38.2 VR6.2
N$21: U12.P$1_TIP VR6.3
N$22: C4:R4.1 U13.P$1_TIP U14.P$2_SWITCH
N$23: C4:R22.1 U14.P$1_TIP
N$24: C4:IC5.12 C4:R53.2 C4:R54.1 VR7.2
N$25: C4:R52.2 C4:R53.1 U15.P$1_TIP VR7.3
N$26: C4:R54.2 VR7.1
N$27: C4:R38.2 VR8.2
N$28: U16.P$1_TIP VR8.3
N$29: U17.P$1_TIP
N$30: U18.P$1_TIP
N$31: U18.P$2_SWITCH U20.P$1_TIP
N$32: U17.P$2_SWITCH U19.P$1_TIP
REF_5: U3.P$2_SWITCH U7.P$2_SWITCH U11.P$2_SWITCH U15.P$2_SWITCH
REF_10: U4.P$2_SWITCH U8.P$2_SWITCH U12.P$2_SWITCH U16.P$2_SWITCH

## Tracks (layer width: path | path; a pad name or v marks a point on that pad's centre or on a via)
+12V  (71 unrouted)
-12V  (63 unrouted)
C1:N$1  (1 unrouted)
C1:N$2  (1 unrouted)
C1:N$3  (2 unrouted)
C1:N$4  (1 unrouted)
C1:N$5  (1 unrouted)
C1:N$6  (1 unrouted)
C1:N$7  (2 unrouted)
C1:N$8  (3 unrouted)
C1:N$9  (2 unrouted)
C1:N$10  (1 unrouted)
C1:N$11  (2 unrouted)
C1:N$12  (3 unrouted)
C1:N$13  (2 unrouted)
C1:N$14  (1 unrouted)
C1:N$15  (3 unrouted)
C1:N$16  (3 unrouted)
C1:N$17  (1 unrouted)
C1:N$18  (2 unrouted)
C1:N$19  (2 unrouted)
C1:N$20  (1 unrouted)
C1:N$21  (1 unrouted)
C1:N$22  (2 unrouted)
C1:N$23  (1 unrouted)
C1:N$24  (1 unrouted)
C1:N$25  (1 unrouted)
C1:N$26  (2 unrouted)
C1:N$27  (3 unrouted)
C1:N$28  (2 unrouted)
C1:N$29  (1 unrouted)
C1:N$30  (2 unrouted)
C1:N$31  (2 unrouted)
C1:N$32  (3 unrouted)
C1:N$33  (1 unrouted)
C1:N$34  (3 unrouted)
C1:N$35  (3 unrouted)
C1:N$36  (1 unrouted)
C1:N$37  (2 unrouted)
C1:N$38  (2 unrouted)
C1:N$39  (2 unrouted)
C1:N$40  (2 unrouted)
C1:N$41  (3 unrouted)
C1:N$42  (3 unrouted)
C1:N$43  (2 unrouted)
C1:N$44  (3 unrouted)
C1:N$45  (2 unrouted)
C1:N$46  (2 unrouted)
C1:N$47  (2 unrouted)
C1:N$48  (2 unrouted)
C1:N$50  (2 unrouted)
C1:OUT_L  (2 unrouted)
C1:OUT_R  (2 unrouted)
C1:PAN_CV  (3 unrouted)
C1:PAN_CV_L  (2 unrouted)
C1:PAN_CV_R  (2 unrouted)
C1:REF_5  (1 unrouted)
C1:VOLUME_CV_LOG  (4 unrouted)
C2:N$1  (1 unrouted)
C2:N$2  (1 unrouted)
C2:N$3  (2 unrouted)
C2:N$4  (1 unrouted)
C2:N$5  (1 unrouted)
C2:N$6  (1 unrouted)
C2:N$7  (2 unrouted)
C2:N$8  (3 unrouted)
C2:N$9  (2 unrouted)
C2:N$10  (1 unrouted)
C2:N$11  (2 unrouted)
C2:N$12  (3 unrouted)
C2:N$13  (2 unrouted)
C2:N$14  (1 unrouted)
C2:N$15  (3 unrouted)
C2:N$16  (3 unrouted)
C2:N$17  (1 unrouted)
C2:N$18  (2 unrouted)
C2:N$19  (2 unrouted)
C2:N$20  (1 unrouted)
C2:N$21  (1 unrouted)
C2:N$22  (2 unrouted)
C2:N$23  (1 unrouted)
C2:N$24  (1 unrouted)
C2:N$25  (1 unrouted)
C2:N$26  (2 unrouted)
C2:N$27  (3 unrouted)
C2:N$28  (2 unrouted)
C2:N$29  (1 unrouted)
C2:N$30  (2 unrouted)
C2:N$31  (2 unrouted)
C2:N$32  (3 unrouted)
C2:N$33  (1 unrouted)
C2:N$34  (3 unrouted)
C2:N$35  (3 unrouted)
C2:N$36  (1 unrouted)
C2:N$37  (2 unrouted)
C2:N$38  (2 unrouted)
C2:N$39  (2 unrouted)
C2:N$40  (2 unrouted)
C2:N$41  (3 unrouted)
C2:N$42  (3 unrouted)
C2:N$43  (2 unrouted)
C2:N$44  (3 unrouted)
C2:N$45  (2 unrouted)
C2:N$46  (2 unrouted)
C2:N$47  (2 unrouted)
C2:N$48  (2 unrouted)
C2:N$50  (2 unrouted)
C2:OUT_L  (2 unrouted)
C2:OUT_R  (2 unrouted)
C2:PAN_CV  (3 unrouted)
C2:PAN_CV_L  (2 unrouted)
C2:PAN_CV_R  (2 unrouted)
C2:REF_5  (1 unrouted)
C2:VOLUME_CV_LOG  (4 unrouted)
C3:N$1  (1 unrouted)
C3:N$2  (1 unrouted)
C3:N$3  (2 unrouted)
C3:N$4  (1 unrouted)
C3:N$5  (1 unrouted)
C3:N$6  (1 unrouted)
C3:N$7  (2 unrouted)
C3:N$8  (3 unrouted)
C3:N$9  (2 unrouted)
C3:N$10  (1 unrouted)
C3:N$11  (2 unrouted)
C3:N$12  (3 unrouted)
C3:N$13  (2 unrouted)
C3:N$14  (1 unrouted)
C3:N$15  (3 unrouted)
C3:N$16  (3 unrouted)
C3:N$17  (1 unrouted)
C3:N$18  (2 unrouted)
C3:N$19  (2 unrouted)
C3:N$20  (1 unrouted)
C3:N$21  (1 unrouted)
C3:N$22  (2 unrouted)
C3:N$23  (1 unrouted)
C3:N$24  (1 unrouted)
C3:N$25  (1 unrouted)
C3:N$26  (2 unrouted)
C3:N$27  (3 unrouted)
C3:N$28  (2 unrouted)
C3:N$29  (1 unrouted)
C3:N$30  (2 unrouted)
C3:N$31  (2 unrouted)
C3:N$32  (3 unrouted)
C3:N$33  (1 unrouted)
C3:N$34  (3 unrouted)
C3:N$35  (3 unrouted)
C3:N$36  (1 unrouted)
C3:N$37  (2 unrouted)
C3:N$38  (2 unrouted)
C3:N$39  (2 unrouted)
C3:N$40  (2 unrouted)
C3:N$41  (3 unrouted)
C3:N$42  (3 unrouted)
C3:N$43  (2 unrouted)
C3:N$44  (3 unrouted)
C3:N$45  (2 unrouted)
C3:N$46  (2 unrouted)
C3:N$47  (2 unrouted)
C3:N$48  (2 unrouted)
C3:N$50  (2 unrouted)
C3:OUT_L  (2 unrouted)
C3:OUT_R  (2 unrouted)
C3:PAN_CV  (3 unrouted)
C3:PAN_CV_L  (2 unrouted)
C3:PAN_CV_R  (2 unrouted)
C3:REF_5  (1 unrouted)
C3:VOLUME_CV_LOG  (4 unrouted)
C4:N$1  (1 unrouted)
C4:N$2  (1 unrouted)
C4:N$3  (2 unrouted)
C4:N$4  (1 unrouted)
C4:N$5  (1 unrouted)
C4:N$6  (1 unrouted)
C4:N$7  (2 unrouted)
C4:N$8  (3 unrouted)
C4:N$9  (2 unrouted)
C4:N$10  (1 unrouted)
C4:N$11  (2 unrouted)
C4:N$12  (3 unrouted)
C4:N$13  (2 unrouted)
C4:N$14  (1 unrouted)
C4:N$15  (3 unrouted)
C4:N$16  (3 unrouted)
C4:N$17  (1 unrouted)
C4:N$18  (2 unrouted)
C4:N$19  (2 unrouted)
C4:N$20  (1 unrouted)
C4:N$21  (1 unrouted)
C4:N$22  (2 unrouted)
C4:N$23  (1 unrouted)
C4:N$24  (1 unrouted)
C4:N$25  (1 unrouted)
C4:N$26  (2 unrouted)
C4:N$27  (3 unrouted)
C4:N$28  (2 unrouted)
C4:N$29  (1 unrouted)
C4:N$30  (2 unrouted)
C4:N$31  (2 unrouted)
C4:N$32  (3 unrouted)
C4:N$33  (1 unrouted)
C4:N$34  (3 unrouted)
C4:N$35  (3 unrouted)
C4:N$36  (1 unrouted)
C4:N$37  (2 unrouted)
C4:N$38  (2 unrouted)
C4:N$39  (2 unrouted)
C4:N$40  (2 unrouted)
C4:N$41  (3 unrouted)
C4:N$42  (3 unrouted)
C4:N$43  (2 unrouted)
C4:N$44  (3 unrouted)
C4:N$45  (2 unrouted)
C4:N$46  (2 unrouted)
C4:N$47  (2 unrouted)
C4:N$48  (2 unrouted)
C4:N$50  (2 unrouted)
C4:OUT_L  (2 unrouted)
C4:OUT_R  (2 unrouted)
C4:PAN_CV  (3 unrouted)
C4:PAN_CV_L  (2 unrouted)
C4:PAN_CV_R  (2 unrouted)
C4:REF_5  (1 unrouted)
C4:VOLUME_CV_LOG  (4 unrouted)
GND  (151 unrouted)
N$1  (2 unrouted)
N$2  (1 unrouted)
N$3  (3 unrouted)
N$4  (2 unrouted)
N$5  (3 unrouted)
N$6  (1 unrouted)
N$7  (1 unrouted)
N$8  (1 unrouted)
N$9  (3 unrouted)
N$10  (3 unrouted)
N$11  (1 unrouted)
N$12  (1 unrouted)
N$13  (1 unrouted)
N$14  (2 unrouted)
N$15  (1 unrouted)
N$16  (3 unrouted)
N$17  (1 unrouted)
N$18  (3 unrouted)
N$19  (1 unrouted)
N$20  (1 unrouted)
N$21  (1 unrouted)
N$22  (2 unrouted)
N$23  (1 unrouted)
N$24  (3 unrouted)
N$25  (3 unrouted)
N$26  (1 unrouted)
N$27  (1 unrouted)
N$28  (1 unrouted)
N$31  (1 unrouted)
N$32  (1 unrouted)
REF_5  (3 unrouted)
REF_10  (3 unrouted)